# Altium PCB Socket_Power.PcbDoc
Units mm, origin at the board's own origin, x right, y up, seen from the top; angles counter-clockwise.
Board outline 90 x 42.76 mm, 2 copper layers (Top Layer, Bottom Layer), stack 1.58 mm thick; 41 components, 23 nets, 117 pads, 126 vias.
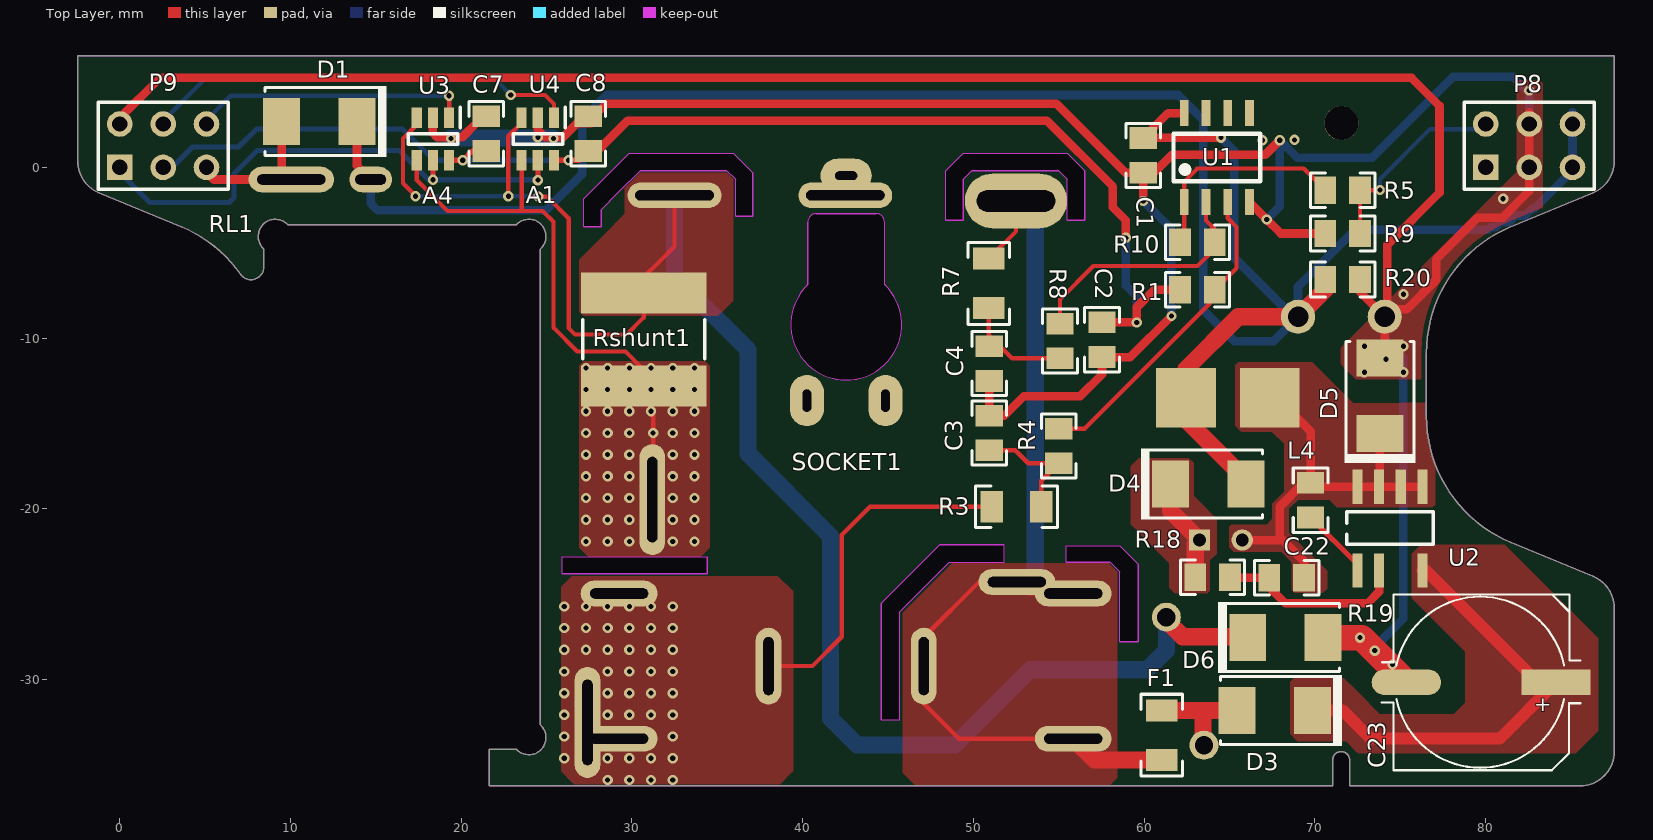
[diagram p0: Top Layer view]
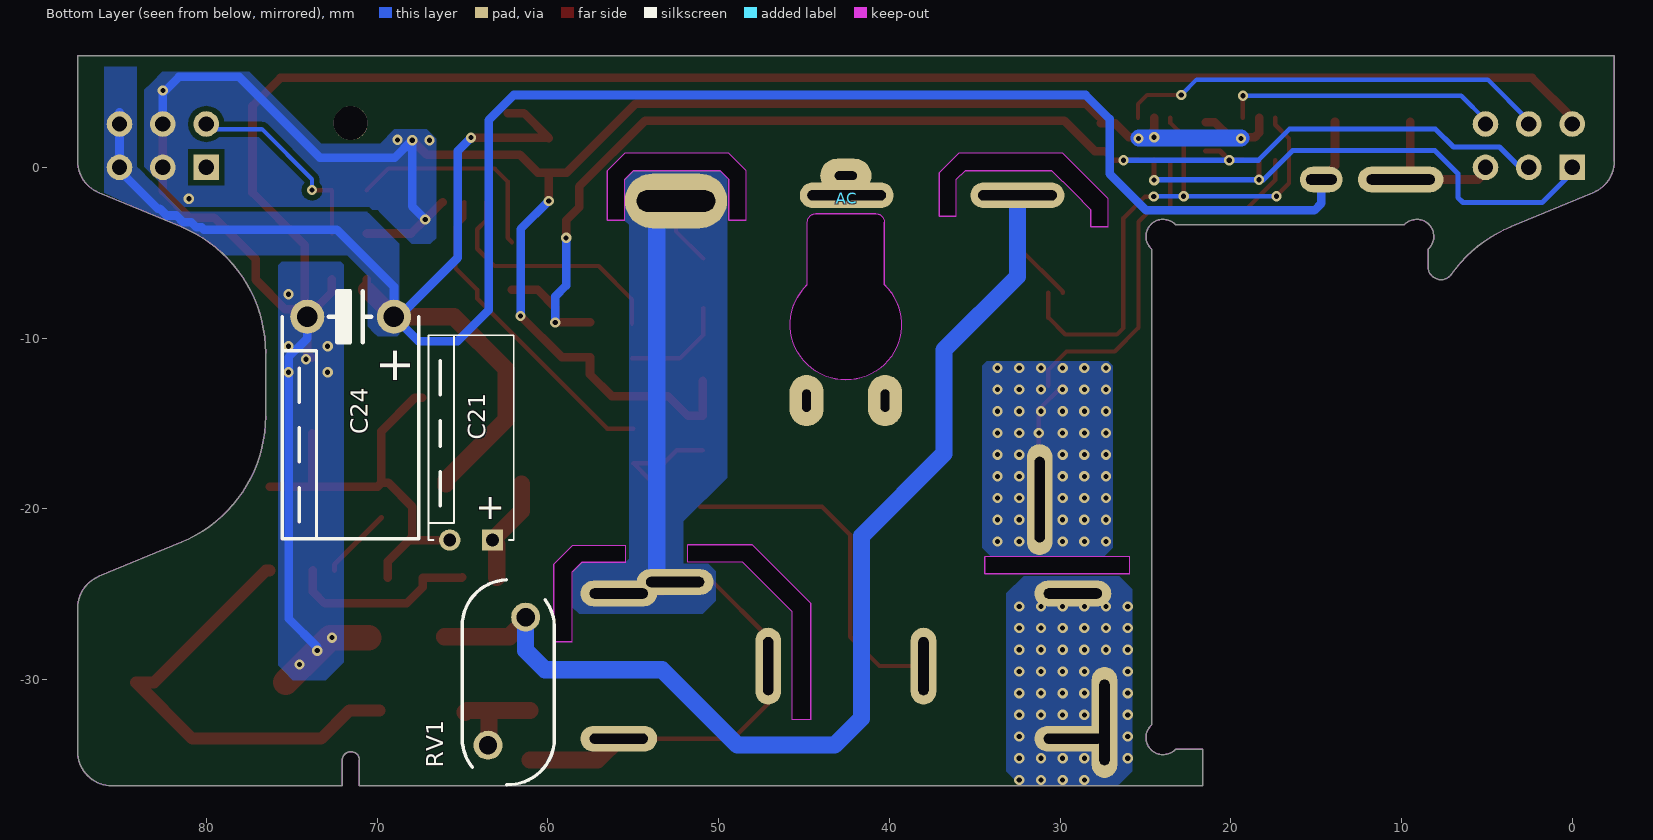
[diagram p1: Bottom Layer view, seen from below]

## Layer stack, top to bottom
Top Solder: solder mask 0.0102, Solder Resist, Dk 3.5
Top Layer: signal copper 0.0356
Dielectric 1: dielectric 1.5086, FR-4, Dk 4.8
Bottom Layer: signal copper 0.0356
Bottom Solder: solder mask 0.0102, Solder Resist, Dk 3.5

## Board outline
21.636,-34.071 23.224,-34.071 ccw(c23.964,-33.4) 24.636,-32.659 24.636,-4.784 ccw(c23.964,-4.043) 23.224,-3.371 9.849,-3.371 ccw(c9.108,-4.043) 8.436,-4.784 8.436,-5.829 cw(c7.686,-5.829) 7.073,-6.262 ccw(c0.536,-10.873) 3.598,-3.482 -1.229,-1.483 cw(c-0.464,0.365) -2.464,0.365 -2.464,6.54 87.536,6.54 87.536,0.365 cw(c85.536,0.365) 86.302,-1.483 81.475,-3.482 ccw(c84.536,-10.873) 76.536,-10.873 76.536,-14.57 ccw(c84.536,-14.57) 81.475,-21.961 86.302,-23.96 cw(c85.536,-25.808) 87.536,-25.808 87.536,-34.221 cw(c85.536,-34.221) 85.536,-36.221 72.036,-36.221 72.036,-34.721 ccw(c71.536,-34.721) 71.036,-34.721 71.036,-36.221 21.636,-36.221
cut-out: 55.448,-23.125 55.448,-22.16 58.572,-22.16 59.665,-23.252 59.665,-27.799 58.572,-27.799 58.572,-23.684 58.014,-23.125
cut-out: 44.602,-32.345 45.695,-32.345 45.695,-26.021 48.59,-23.125 51.816,-23.125 51.816,-22.109 48.031,-22.109 44.602,-25.538
cut-out: 48.387,-3.11 48.387,-0.189 49.403,0.827 55.499,0.827 56.515,-0.189 56.515,-3.11 55.499,-3.11 55.499,-0.697 54.991,-0.189 49.911,-0.189 49.403,-0.697 49.403,-3.11
cut-out: 25.908,-23.811 25.908,-22.795 34.417,-22.795 34.417,-23.811
cut-out: 27.178,-3.491 27.178,-1.84 29.845,0.827 35.941,0.827 37.084,-0.316 37.084,-2.856 36.068,-2.856 36.068,-0.697 35.56,-0.189 30.48,-0.189 29.21,-1.459 28.194,-2.475 28.194,-3.491
cut-out: 40.295,-6.858 ccw(c42.545,-9.204) 44.795,-6.858 44.795,-3.204 ccw(c44.295,-3.204) 44.295,-2.704 40.795,-2.704 ccw(c40.795,-3.204) 40.295,-3.204

## Design rules (kind name [scope] priority, off if disabled: settings)
Clearance Clearance_1 [InNet('GND')] p1: gap=0.3
Clearance cutout [IsRegion] p2: gap=0.01
Clearance keepout [OnLayer('Keep-Out Layer')] p3: gap=0.01
Clearance [All] p4: gap=0.254
HoleSize [All] p1: absolutevalues=TRUE maxlimit=5 minlimit=0.01 maxpercent=80.000 minpercent=20.000
MinimumSolderMaskSliver [All] p1: minsoldermaskwidth=0.01
PolygonConnect [All] p1: connectstyle=Direct reliefconductorwidth=0.254 reliefentries=4 polygonreliefangle="90 Angle" airgapwidth=0.254
RoutingVias [All] p1: holewidth=0.3 width=0.6 viastyle="Through Hole" minholewidth=0.3 minwidth=0.6 maxholewidth=5 maxwidth=5
SilkToSilkClearance [All] p1: silktosilkclearance=0.1
SilkToSolderMaskClearance [IsPad] p1: minsilkscreentomaskgap=0.01 clearancetoexposedcopper=TRUE
SolderMaskExpansion [All] p1: expansion=0.102
Width [All] p1: maxlimit=5 minlimit=0.254 preferedwidth=0.254
26 further rules are at their usual default settings.

## Components (designator, comment, footprint, x,y, rotation, side; value= is the part's Value field where it differs from the comment)
AC "Header 3" CHAN3DONGTO 42.494,-1.637 r0 bottom locked
C1 "104" 0805_HV 59.944,0.7 r90 top
C2 "104" 0805_HV 57.531,-10.095 r90 top
C3 "221" 0805_HV 50.927,-15.556 r270 top
C4 "221" 0805_HV 50.927,-11.492 r90 top
C7 "104" 0805_HV 21.463,1.97 r270 top
C8 "104" 0805_HV 27.432,1.97 r270 top
C21 "10uF" CAP_100N 64.496,-21.83 r0 bottom
C22 "104" 0805_HV 69.748,-19.493 r270 top
C23 "400AX6R8M8x11" PANACAP-G-GENERIC 79.68,-30.161 r180 top locked
C24 "220uF" CAPU200N 71.552,-8.749 r180 bottom locked
D1 "US1M-13-F" SMB 11.684,2.681 r0 top
D3 "US1M-13-F" SMB 67.64,-31.812 r0 top
D4 "US1M-13-F" SMB 63.754,-18.553 r180 top
D5 "US1M-13-F" SMB 73.812,-13.372 r270 top
D6 "US1M-13-F" SMB 68.275,-27.545 r180 top
F1 "Res" 1206 61.036,-33.26 r90 top
L4 "680uF" "Inductor 4.5x5" 65.151,-13.397 r0 top
P8 "Header 3X2" HDR2X3 80.01,0 r0 top
P9 "Header 3X2" HDR2X3 0,0 r0 top locked
R1 "22K" 0805_HV 63.119,-7.174 r180 top
R3 "2M" 1206 52.525,-19.874 r0 top
R4 "2.2K" 0805_HV 54.991,-16.318 r270 top
R5 "10K" 0805_HV 71.628,-1.332 r180 top
R7 "2M" 1206 50.902,-6.791 r270 top
R8 "2.2K" 0805_HV 55.067,-10.171 r270 top
R9 "10K" 0805_HV 71.628,-3.872 r180 top
R10 "22K" 0805_HV 63.119,-4.38 r0 top
R18 "13k" 0805_HV 64.008,-24.014 r180 top
R19 "2K" 0805_HV 68.351,-24.04 r180 top
R20 "3k3" 0805_HV 71.628,-6.564 r180 top
RL1 "Component_1" RELAY20ASLA12VDC 10.045,-0.711 r0 top locked
Rshunt1 "0.006R" RESC2728 30.683,-10.07 r90 top
RV1 "S10K275E2" VAR_S10K275E2 62.316,-30.154 r270 bottom locked
SOCKET1 "Header 3" SOCKET 42.545,-0.49 r0 top locked
U1 "LM358 SOP8_MH" "SOP 8" 64.262,0.573 r0 top locked
U2 "LNK306" "SOP 7" 72.492,-23.606 r90 top locked
U3 "INA181A4IDBVT" SOT95P280X145-6N 18.339,1.665 r270 top
U4 "INA181A1IDBVT" SOT95P280X145-6N 24.486,1.665 r270 top
Wp1 "Socket" PIN1 42.468,-97.043 r0 top
Wp2 "Socket" PIN1 90.915,-86.341 r0 top

## Footprints (in the part's own frame and the unit in brackets; to place one, negate y for a bottom-side part, rotate by r counter-clockwise, add the part's x,y. Pads: shape width x height; smd on the part's side, far side on the other; paste and mask are expansions set on the pad)
0805_HV [mil] "0805 with 30mil clearance between pads"
  rect 50x63 smd: 1(-40,0) 2(40,0)
  silkscreen extent -74,-40 74,40, body extent -43,-29 43,29, height 57
1206 [mm] "1206 from SM-752 data"
  rect 1.3x1.85 smd: 1(1.45,0) 2(-1.45,0)
  silkscreen extent -2.4,-1.21 2.4,1.21, body extent -1.7,-0.9 1.7,0.9, height 1.35
CAP_100N [mm] "PANASONIC"
  rect 1.25x1.25 hole 0.75: 1(-1.25,0)
  round 1.25 hole 0.75: 2(1.25,0)
  silkscreen extent -2.5,-12 2.5,0
CAPU200N [mm]
  round 2 hole 1.2: 1(2.54,0) 2(-2.54,0)
  silkscreen extent -4,-13 4,1.5
CHAN3DONGTO [mm]
  oval 5.5x1.5 hole 0.6 slot 4.6 at 0 deg: 1(-10,0) 2(0,0)
  oval 6x3.2 hole 1.25 slot 4.6 at 0 deg: 3(10,0.33)
  body extent -13,-5.15 13,0.25, height 10.4
HDR2X3 [mm] "Connector; Header; 3x2 Position"
  rect 1.5x1.5 hole 0.9: 1(0,0)
  round 1.5 hole 0.9: 2(0,2.54) 3(2.54,0) 4(2.54,2.54) 5(5.08,0) 6(5.08,2.54)
  silkscreen extent -1.27,-1.27 6.35,3.81
"Inductor 4.5x5" [mm]
  rect 3.5x3.5 smd: 1(2.2,-0.1) 2(-2.7,-0.1)
  body extent -2.6,-2.6 2.2,2.2, height 2
PANACAP-G-GENERIC [mil]
  rect 160x59.06 smd: 1(-175,0)
  oval 160x59.06 smd: 2(170,0)
  silkscreen extent -231,-203 227,203, body extent -233,-203 223,203, height 402
PIN1 [mm] "Connector; Plug"
RELAY20ASLA12VDC [mm]
  oval 5x1.5 hole 0.6 slot 4 at 0 deg paste+0: 1(0,0)
  oval 2.5x1.5 hole 0.6 slot 1.8 at 0 deg paste+0: 2(4.65,0)
  oval 1.5x6.5 hole 0.6 slot 5 at 90 deg paste+0: 3(21.15,-18.75) 4(17.35,-31.8)
  body extent -1.59,-33.68 21.31,0.37, height 19.8
RESC2728 [mm] "Chip Resistor, 2-Leads, Body 6.9x7.1mm, IPC Medium Density"
  rect 2.4x7.35 smd: 1(-2.725,0) 2(2.725,0)
  silkscreen extent -1.15,-3.58 1.15,3.57, body extent -3.55,-3.65 3.55,3.65, height 0.6
SMB [mm] "Molded Diode, 2-Leads, Body 5.4x3.6mm, IPC Medium Density, based on OnSemi component dimensions"
  rect 2.159x2.743 smd: 1(2.21,0) 2(-2.21,0)
  silkscreen extent -3.17,-2.08 3.94,2.08, body extent -2.7,-1.8 2.7,1.8, height 2.32
SOCKET [mm]
  oval 4.5x1.5 hole 0.6 slot 3.4 at 0 deg: 1(-13.3,-24.471) 1(-13.3,-32.971) 2(10,-23.795) 2(13.3,-32.971) 2(13.3,-24.471)
  oval 1.5x4.5 hole 0.6 slot 3.4 at 90 deg: 1(-4.55,-28.72) 2(4.55,-28.72)
  oval 2x3 hole 0.5 slot 1.3 at 90 deg: 3(-2.3,-13.17) 3(2.3,-13.17)
  oval 3x2 hole 0.5 slot 1.3 at 0 deg: 3(0,0.001)
  Keep-Out Layer lines w0.013: -2.25,-6.375 ccw(c0,-8.72) 2.25,-6.375 2.25,-2.72 ccw(c1.75,-2.72) 1.75,-2.22 -1.75,-2.22 ccw(c-1.75,-2.72) -2.25,-2.72 -2.25,-6.375
  body extent -14.74,-33.27 14.86,0.15, height 14.21
"SOP 7" [mm]
  rect 2x0.6 smd: 1(0,0) 2(0,-1.27) 4(0,-3.81) 5(4.9,-3.81) 6(4.9,-2.54) 7(4.9,-1.27) 8(4.9,0)
  silkscreen extent 1.52,-4.44 3.43,0.64, body extent -0.66,-4.38 5.39,0.52, height 1.36
"SOP 8" [mil]
  rect 20x60 smd: 1(-75,-102.5) 2(-25,-102.5) 3(25,-102.5) 4(75,-102.5) 5(75,102.5) 6(25,102.5) 7(-25,102.5) 8(-75,102.5)
  silkscreen extent -100,-55 100,55, body extent -98,-120 100,117, height 63
SOT95P280X145-6N [mm]
  rect 1.2x0.6 smd: 1(-1.25,0.95) 2(-1.25,0) 3(-1.25,-0.95) 4(1.25,-0.95) 5(1.25,0) 6(1.25,0.95)
  silkscreen extent -1.85,-1.45 0.3,1.6, body extent -1.4,-1.45 1.4,1.45, height 1.45
VAR_S10K275E2 [mm] "EPCOS"
  round 1.7 hole 1.067: 1(-3.81,1.016) 2(3.69,-1.184)
  silkscreen extent -6,-2.7 6,2.7, body extent -6.02,-2.7 5.98,2.7, height 15

## Part data
AC SOCKET1: "Header, 3-Pin"
C1 C2 C3 C4 C7 C8 C22: library part CM, "Cap SMD"
C21: library part TU_NHOM_10uF_25V_MH, "TU_NHOM_10uF_25V_MH"
C23: "CAP, AL, 6.8uF, 400V, +/-20%, TH"
C24: library part TU_NHOM_220uF_25V_MH, "TU_NHOM_220uF_25V_MH"
D1 D3 D4 D5 D6: library part MURS160-13-F, "Diode, Ultrafast, 600V, 1A, SMB"
F1: library part Res-SMD, "Resistor"
L4: library part "Inductor 4.5x5_MH"
P8 P9: "Header, 3-Pin, Dual row"
R1 R3 R4 R5 R7 R8 R9 R10 R18 R19 R20 Rshunt1: library part R, "Resistor 1/4W"
RV1: "Varistor 275V RMS 10MM Radial, TH"
U2: library part Component_1
U3 U4: library part INA181

## Free pads (board coordinates)
  round 2 hole 2 paste+0: 2(71.552,2.591)

## Via types
v1: diameter 0.6, hole 0.3, Top Layer to Bottom Layer, tented both sides, 126 vias

## Nets (pads, with @x,y where several pads share a name; then routed paths per layer and width w, separated by ;. In a path a pad name is that pad's centre, name@x,y a point inside that pad or via, vN(x,y) a via of type N, cw(c..) or ccw(c..) an arc to the next point about the centre after c; other vN are vias at no path point)
3.3V: C2.2 C7.2 C8.2 P9.3 R1.2 U3.6 U4.6 | length 77.7
  Top Layer w0.3: U3.6 20.091,0.415 20.63,0.954 C7.2 ; U4.6 v1(26.289,0.415) 26.933,0.415 27.432,0.915 C8.2
  Top Layer w0.5: C8.2 27.965,0.954 29.751,2.74 54.297,2.74 58.166,-1.129 58.166,-2.348 58.928,-3.11 v1(58.928,-4.126) ; C2.2 v1(59.563,-9.079) 59.563,-8.19 60.579,-7.174 R1.2
  Bottom Layer w0.3: P9.3@2.54,-0.3 2.76,-0.3 4.26,1.2 6.96,1.2 8,2.24 16.57,2.24 18.39,0.421 v1(20.091,0.421) 26.284,0.421 v1(26.289,0.415)
  Bottom Layer w0.5: v1(58.928,-4.126) 58.928,-6.92 59.563,-7.555 v1(59.563,-9.079)
BP: C22.2 U2.1 | length 4.2
  Top Layer w0.3: C22.2 72.492,-23.252 U2.1
CURRENT_SIGNAL1: P9.6 U3.1 | length 16.6
  Top Layer w0.254: U3.1 v1(19.289,4.195)
  Bottom Layer w0.254: P9.6@5.08,2.24 P9.6 5.08,2.77 6.505,4.195 v1(19.289,4.195)
CURRENT_SIGNAL2: P9.4 U4.1 | length 25.8
  Top Layer w0.254: v1(22.9,4.24) 24.9,4.24 25.436,3.704 U4.1
  Bottom Layer w0.254: P9.4@2.54,2.24 P9.4 2.54,2.73 4.95,5.14 22,5.14 v1(22.9,4.24)
FB: R18.1 R19.2 U2.2 | length 11.2
  Top Layer w0.5: R18.1 65.049,-24.04 R19.2 67.335,-24.598 68.275,-25.538 73.076,-25.538 73.762,-24.852 U2.2
GND: C1.1 C2.1 C3.1 C4.1 C7.1 C8.1 C23.2 C24.2 D5.2 D6.2 P8.3 P8.4 P9.2 R9.2 R20.1 U1.4 U3.2 U4.2 | length 254.2
  Top Layer w0.5: P9.2@0,2.24 P9.2 0,2.89 2.35,5.24 75.66,5.24 77.3,3.6 77.3,-1.477 74.244,-4.532 74.244,-8.723 74.219,-8.749 C24.2 ; U3.2 18.339,2.021 18.594,1.765 20.061,1.765 20.926,2.63 C7.1@21.463,2.63 ; U4.2 24.486,2.187 24.908,1.765 25.963,1.765 26.778,2.58 C8.1@27.61,2.58 ; C8.1 27.746,2.986 28.5,3.74 54.847,3.74 58.903,-0.316 C1.1 ; C4.1 C3.1 51.816,-14.54 52.959,-13.397 56.261,-13.397 57.531,-12.127 C2.1 59.182,-11.111 v1(61.595,-8.698) ; v1(59.944,-1.967) C1.1 ; U1.4 v1(67.183,-3.046) 68.008,-3.872 R9.2 ; v1(67.945,1.589) 67.096,0.74 61.635,0.74 60.579,-0.316 C1.1 ; R20.1 72.644,-7.301 C24.2 ; D5.2 74.092,-10.882 C24.2 ; C24.2@74.651,-8.317 75.379,-8.317 77.11,-6.586 77.11,-5.375 79.534,-2.951 80.982,-2.951 82.55,-1.383 P8.3 P8.4 P8.4@82.55,3.24
  Top Layer w1.5: D6.2 v1(72.644,-27.545) 72.746,-27.545 v1(73.508,-28.307) C23.2
  Bottom Layer w0.254: v1@19.38,1.691 v1(19.406,1.691) ; v1@25.375,1.716 v1(25.4,1.691)
  Bottom Layer w0.5: v1(59.944,-1.967) 61.595,-3.618 v1(61.595,-8.698) ; v1(67.183,-3.046) 67.945,-2.284 v1(67.945,1.589) 68.961,0.573 73.355,0.573 78.08,5.297 81.61,5.297 v1@82.55,4.358 ; v1(73.508,-28.307) 73.508,-28.104 75.184,-26.427 v1(75.184,-12) 75.184,-11.111 74.092,-10.019 C24.2 ; P8.4@82.55,2.24 P8.4 v1@82.55,4.358 ; v1(82.55,4.51) v1@82.55,4.358
  Bottom Layer w1: v1@19.406,1.716 v1@25.375,1.716
  other v1: 74.549,-29.12 72.898,-12 74.168,-11.238 72.898,-10.476 75.184,-10.476 75.184,-7.428 81.026,-1.84 66.929,1.589 68.809,1.614 24.486,1.767
L: AC.1 D6.1 Rshunt1.2 RV1.1 U3.3 U4.3 | length 103.6
  Top Layer w0.254: v1(17.323,-1.688) 17.323,-1.662 16.586,-0.926 16.586,1.691 17.389,2.493 U3.3 ; v1(22.758,-1.688) 22.758,1.818 23.536,2.595 U4.3 ; v1(24.511,-1.713) 25.019,-1.713 26.289,-2.983 26.289,-9.409 26.67,-9.79 29.693,-9.79 30.683,-8.8 Rshunt1.2 ; Rshunt1.2@29.845,-7.337 29.845,-7.276 32.494,-4.626 AC.1
  Top Layer w1: RV1.1 61.3,-26.539 62.255,-27.494 D6.1@66.065,-27.494
  Bottom Layer w0.254: v1(17.323,-1.688) v1(22.758,-1.688) v1@24.511,-1.688
  Bottom Layer w1: AC.1 32.494,-6.394 36.805,-10.705 36.805,-16.775 41.631,-21.601 41.631,-32.269 43.205,-33.844 48.895,-33.844 53.315,-29.424 60.173,-29.424 61.3,-28.297 RV1.1
L1: R3.2 RL1.4 SOCKET1.1 | length 20.4
  Top Layer w0.254: SOCKET1.1@37.995,-29.21 40.575,-29.21 42.291,-27.494 42.291,-21.525 43.942,-19.874 R3.2
  other v1: 28.575,-35.876 29.845,-35.876 31.115,-35.876 32.385,-35.876 26.035,-34.606 28.575,-34.606 29.845,-34.606 31.115,-34.606 32.385,-34.606 26.035,-33.336 32.385,-33.336 26.035,-32.066 28.575,-32.066 29.845,-32.066 31.115,-32.066 32.385,-32.066 26.035,-30.796 28.575,-30.796 29.845,-30.796 31.115,-30.796 32.385,-30.796 26.035,-29.526 28.575,-29.526 29.845,-29.526 31.115,-29.526 32.385,-29.526 26.035,-28.256 27.305,-28.256 28.575,-28.256 29.845,-28.256 31.115,-28.256 32.385,-28.256 26.035,-26.986 27.305,-26.986 28.575,-26.986 29.845,-26.986 31.115,-26.986 32.385,-26.986 26.035,-25.716 27.305,-25.716 28.575,-25.716 29.845,-25.716 31.115,-25.716 32.385,-25.716
LOUT: RL1.3 Rshunt1.1 U3.4 U4.4 | length 33.9
  Top Layer w0.254: U3.4 17.389,-0.738 19.202,-2.551 23.52,-2.551 ; U4.4 23.536,-2.536 23.52,-2.551 ; Rshunt1.1@29.845,-12.787 31.242,-14.184 v1(31.242,-15.556) 31.242,-19.414 RL1.3 ; Rshunt1.1 30.683,-11.848 29.616,-10.781 26.797,-10.781 25.4,-9.384 25.4,-3.186 24.765,-2.551 23.52,-2.551
  other v1: 27.305,-21.906 28.575,-21.906 29.845,-21.906 32.385,-21.906 33.655,-21.906 27.305,-20.636 28.575,-20.636 29.845,-20.636 32.385,-20.636 33.655,-20.636 27.305,-19.366 28.575,-19.366 29.845,-19.366 32.385,-19.366 33.655,-19.366 27.305,-18.096 28.575,-18.096 29.845,-18.096 32.385,-18.096 33.655,-18.096 27.305,-16.826 28.575,-16.826 29.845,-16.826 32.385,-16.826 33.655,-16.826 27.305,-15.556 28.575,-15.556 29.845,-15.556 32.385,-15.556 33.655,-15.556 27.305,-14.286 28.575,-14.286 29.845,-14.286 31.115,-14.286 32.385,-14.286 33.655,-14.286 27.305,-13.016 28.575,-13.016 29.845,-13.016 31.115,-13.016 32.385,-13.016 33.655,-13.016 27.305,-11.746 28.575,-11.746 29.845,-11.746 31.115,-11.746 32.385,-11.746 33.655,-11.746
N: AC.3 F1.2 R7.2 SOCKET1.2 | length 57.4
  Top Layer w0.254: R7.2 52.494,-3.748 AC.3 ; SOCKET1.2@55.845,-33.461 49.147,-33.461 47.095,-31.409 47.095,-29.21 47.095,-27.516 50.326,-24.285 52.545,-24.285 53.221,-24.961 SOCKET1.2@55.845,-24.961
  Top Layer w1: SOCKET1.2@55.845,-33.461 57.094,-34.71 F1.2
  Bottom Layer w1: AC.3 52.73,-1.967 53.619,-2.856 53.619,-23.989 53.323,-24.285 SOCKET1.2@52.545,-24.285
NetC3_2: C3.2 R3.1 R4.2 | length 7.3
  Top Layer w0.254: C3.2 52.451,-16.572 53.213,-17.334 R4.2 53.975,-18.35 R3.1
NetC4_2: C4.2 R7.1 R8.2 | length 6.3
  Top Layer w0.254: R7.1 50.902,-9.816 52.273,-11.187 R8.2
NetC21_1: C21.1 D4.1 R18.2 | length 6.3
  Top Layer w1: D4.1 61.544,-20.128 C21.1 62.992,-22.084 R18.2
NetR1_1: R1.1 R4.1 U1.3 | length 18.7
  Top Layer w0.254: R4.1 56.515,-15.302 64.135,-7.682 R1.1 65.405,-5.904 65.405,-3.491 64.897,-2.983 U1.3
NetR8_1: R8.1 R10.2 U1.2 | length 14.8
  Top Layer w0.254: R8.1 55.067,-7.733 57.023,-5.777 63.119,-5.777 64.135,-4.761 R10.2@64.135,-4.507 ; U1.2 63.627,-3.11 64.135,-3.618 R10.2@64.135,-4.507 ; R10.2 R10.2@64.135,-4.507
NN: D3.2 F1.1 RV1.2 | length 6
  Top Layer w1: F1.1 63.271,-31.81 ; RV1.2@63.439,-33.844 63.439,-31.978 63.271,-31.81 ; D3.2@64.846,-31.914 64.742,-31.81 63.271,-31.81
RL1C: D1.2 P9.5 RL1.1 | length 8.8
  Top Layer w0.5: P9.5@5.08,-0.3 5.491,-0.711 RL1.1 9.474,-0.14 D1.2
S: C21.2 C22.1 D5.1 L4.1 R19.1 U2.5 U2.6 U2.7 U2.8 | length 25.5
  Top Layer w0.5: C21.2 68.123,-21.83 ; L4.1 67.791,-13.497 69.748,-15.454 C22.1 ; R19.1 69.367,-23.074 68.123,-21.83 ; D5.1 73.812,-18.655 U2.7 ; U2.5 U2.6 U2.7 ; 68.123,-21.83 67.945,-21.652 67.945,-19.874 69.342,-18.477 C22.1 ; C22.1 69.977,-18.706 U2.8 U2.7
V1: R5.2 R10.1 U1.1 | length 12.8
  Top Layer w0.254: R10.1 62.357,-4.126 U1.1 62.357,-0.824 63.119,-0.062 69.342,-0.062 R5.2
VCC_RELAY: C1.2 C24.1 D1.1 D4.2 L4.2 P8.5 P8.6 R20.2 RL1.2 U1.8 | length 140.7
  Top Layer w0.5: D1.1 13.894,0.09 RL1.2 ; C1.2 61.404,3.177 U1.8 ; C1.2@60,1.74 v1(64.5,1.74) ; D4.2@65.913,-18.604 66.04,-18.731 D4.2@66.218,-18.731 ; R20.2@70.612,-7.149 R20.2
  Top Layer w1: D4.2 65.964,-18.299 62.451,-14.786 L4.2 62.451,-11.804 65.507,-8.749 C24.1 R20.2@70.612,-7.149
  Bottom Layer w0.5: RL1.2 14.695,-2.108 15.104,-2.517 24.952,-2.517 27.1,-0.369 27.1,2.84 28.5,4.24 62,4.24 63.475,2.765 63.475,-8.368 65.278,-10.171 67.589,-10.171 C24.1 ; v1(64.5,1.74) 65.278,0.962 65.278,-5.294 68.732,-8.749 C24.1 ; P8.6@85.09,3.24 P8.6 P8.5 85.09,-0.189 82.862,-2.417 82.727,-2.417 82.327,-2.818 81.76,-2.818 81.358,-3.22 80.873,-3.22 80.577,-3.516 80.278,-3.516 80.151,-3.643 72.365,-3.643 69.012,-6.996 C24.1
VIN1: C23.1 D3.1 U2.4 | length 26.9
  Top Layer w0.7: D3.1 71.628,-31.812 73.279,-33.463 80.823,-33.463 C23.1 83.058,-30.161 76.503,-23.606 U2.4
VOL_SIGNAL: P8.2 R5.1 R9.1 | length 11.8
  Top Layer w0.254: R9.1 R5.1 v1(73.812,-1.332)
  Bottom Layer w0.254: v1(73.812,-1.332) 73.812,-0.697 76.749,2.24 P8.2@80.01,2.24
VREF: P9.1 U3.5 U4.5 | length 30.3
  Top Layer w0.3: v1(18.339,-0.722) U3.5 ; v1(24.486,-0.748) U4.5
  Bottom Layer w0.3: P9.1@0,-0.3 1.76,-2.06 6.4,-2.06 6.7,-1.76 6.7,-0.36 8.039,0.979 16.383,0.979 18.085,-0.722 v1(18.339,-0.722) 24.46,-0.722 v1(24.486,-0.748)
pads on no net: AC.2 P8.1 SOCKET1.3 U1.5 U1.6 U1.7

## Polygon pours and split planes (outlines as drawn)
VIN1 on Top Layer "Bottom Layer-No Net" (solid, remove dead copper, pour order 29): 68.555,-30.237 68.555,-33.184 68.885,-33.514 68.986,-33.615 70.256,-33.615 71.831,-33.615 72.466,-34.25 72.542,-34.327 82.017,-34.327 85.268,-34.327 86.563,-33.031 86.589,-33.006 86.589,-30.11 86.589,-27.57 82.55,-23.532 81.128,-22.109 76.632,-22.109 76.2,-22.109 75.971,-22.338 75.667,-22.643 75.667,-23.836 75.667,-25.233 76.53,-26.097 78.816,-28.383 78.816,-30.821 78.816,-31.355 78.232,-31.939 78.13,-32.041 76.124,-32.041 73.812,-32.041 72.441,-30.669 71.704,-29.932 68.758,-29.932 68.555,-30.136 68.555,-30.186
N on Top Layer "Bottom Layer-No Net" (solid, remove dead copper, pour order 24): 57.912,-23.176 48.768,-23.176 47.117,-24.827 45.847,-26.097 45.847,-30.415 45.847,-35.449 46.609,-36.211 53.848,-36.211 57.958,-36.211 58.293,-35.876 58.42,-35.749 58.42,-33.463 58.42,-23.684 57.912,-23.176
L1 on Top Layer "Bottom Layer-No Net" (solid, remove dead copper, pour order 23): 34.353,-23.938 26.479,-23.938 26.098,-24.319 25.844,-24.573 25.844,-26.097 25.844,-35.368 26.479,-36.003 26.606,-36.13 28.765,-36.13 38.671,-36.13 39.306,-35.495 39.433,-35.368 39.433,-30.796 39.433,-24.827 38.544,-23.938
LOUT on Top Layer "Bottom Layer-No Net" (solid, remove dead copper, pour order 21): 27.305,-11.365 27.178,-11.365 26.924,-11.619 26.924,-21.144 26.924,-22.287 27.178,-22.541 27.432,-22.795 29.845,-22.795 34.036,-22.795 34.417,-22.414 34.544,-22.287 34.544,-20.382 34.544,-11.619 34.29,-11.365
L on Top Layer "Bottom Layer-No Net" (solid, remove dead copper, pour order 19): 35.56,-0.316 30.48,-0.316 30.226,-0.57 29.591,-1.205 29.591,-2.094 29.591,-2.729 28.321,-3.999 26.924,-5.396 26.924,-7.682 26.924,-8.444 27.178,-8.698 27.813,-8.698 35.052,-8.698 35.56,-8.19 35.941,-7.809 35.941,-0.697
NetC21_1 on Top Layer "Bottom Layer-No Net" (solid, remove dead copper, pour order 30): 62.611,-17.029 59.69,-17.029 59.385,-17.334 59.207,-17.512 59.207,-17.817 59.207,-20.915 59.842,-21.55 61.468,-23.176 61.468,-24.192 61.468,-24.624 61.773,-24.929 61.798,-24.954 62.916,-24.954 63.703,-24.954 63.856,-24.802 63.856,-23.582 63.856,-23.024 64.135,-22.744 64.262,-22.617 64.262,-21.042 64.262,-20.611 63.221,-19.569 62.89,-19.239 62.89,-18.274 62.89,-17.309 62.611,-17.029
GND on Top Layer "Bottom Layer-No Net" (solid, remove dead copper, pour order 36): 74.041,-8.038 81.813,-0.265 81.813,4.027 81.813,4.967 81.915,5.069 81.94,5.094 83.134,5.094 83.185,5.094 83.312,4.967 83.337,4.942 83.337,3.9 83.337,-2.636 83.21,-2.763 83.194,-2.78 82.118,-3.212 82.093,-3.237 80.061,-4.228 80.01,-4.278 78.156,-5.955 76.937,-8.139 76.53,-9.511 76.53,-12.406 72.39,-12.406 71.73,-11.746 71.526,-11.543 71.526,-10.552 71.577,-10.501 74.549,-7.53
S on Top Layer "Bottom Layer-No Net" (solid, remove dead copper, pour order 28): 64.999,-21.042 64.999,-22.262 65.227,-22.49 65.253,-22.516 66.345,-22.516 68.021,-22.516 68.377,-22.871 68.631,-23.125 68.631,-24.649 68.631,-24.725 68.783,-24.878 68.834,-24.929 69.901,-24.929 70.46,-24.929 70.663,-24.725 70.714,-24.675 70.714,-23.887 70.714,-23.633 68.656,-21.576 68.478,-21.398 68.478,-20.611 68.478,-20.001 69.012,-19.468 69.825,-19.468 70.841,-19.468 71.222,-19.849 71.272,-19.899 76.454,-19.899 76.886,-19.899 77.038,-19.747 77.038,-18.604 77.038,-17.664 76.863,-16.798 76.657,-16.013 76.53,-15.018 76.53,-13.778 75.057,-13.778 75.032,-13.803 73.254,-13.803 72.238,-13.803 70.307,-11.873 69.85,-11.416 68.25,-11.416 65.507,-11.416 65.303,-11.619 65.329,-11.644 65.329,-12.178 65.329,-15.124 65.684,-15.48 66.98,-15.48 67.488,-15.48 68.224,-16.216 68.199,-16.242 68.199,-17.105 68.199,-19.01 67.589,-19.62 67.513,-19.696 67.513,-20.458 67.513,-20.585 67.208,-20.89 67.158,-20.941 65.786,-20.941 65.1,-20.941
GND on Bottom Layer "Bottom Layer-No Net" (solid, remove dead copper, pour order 32): 66.548,1.614 66.548,-3.872 66.548,-4.151 66.853,-4.456 66.878,-4.482 67.462,-4.482 67.97,-4.482 69.774,-2.678 69.977,-2.475 81.407,-2.475 83.388,-0.494 83.642,-0.24 83.642,1.132 83.642,4.535 83.21,4.967 82.575,5.602 81.153,5.602 77.495,5.602 75.438,3.545 73.279,1.386 70.282,1.386 69.825,1.386 68.986,2.224 67.107,2.224 66.548,1.665
GND on Bottom Layer "Bottom Layer-No Net" (solid, remove dead copper, pour order 27): 71.958,-5.726 71.958,-28.993 72.568,-29.602 73,-30.034 74.295,-30.034 74.93,-30.034 75.413,-29.551 75.794,-29.17 75.794,-24.979 75.794,-5.726 75.59,-5.523 75.514,-5.523 72.136,-5.523 71.958,-5.701
N on Bottom Layer "Bottom Layer-No Net" (solid, remove dead copper, pour order 25): 52.654,-22.439 52.095,-22.998 52.095,-23.151 52.019,-23.227 51.359,-23.227 50.597,-23.227 50.292,-23.532 50.165,-23.659 50.165,-24.725 50.165,-25.386 50.47,-25.691 50.927,-26.148 57.302,-26.148 58.166,-26.148 58.572,-25.741 58.547,-25.716 58.547,-25.081 58.547,-23.659 58.014,-23.125 55.448,-23.125 55.067,-22.744 54.94,-22.744
N on Bottom Layer "Bottom Layer-No Net" (solid, remove dead copper, pour order 22): 49.505,-1.611 49.505,-4.99 49.505,-18.172 52.07,-20.738 52.07,-22.77 52.07,-24.141 52.019,-24.192 51.841,-24.37 51.029,-24.37 54.254,-24.37 54.534,-24.09 54.889,-24.446 55.27,-24.446 55.397,-24.446 55.423,-24.471 55.245,-24.294 55.245,-22.643 55.245,-3.364 55.499,-3.11 55.474,-3.085 55.474,-0.875 55.474,-0.672 54.991,-0.189 49.911,-0.189 49.53,-0.57 49.505,-0.595 49.505,-1.434
L1 on Bottom Layer "Bottom Layer-No Net" (solid, remove dead copper, pour order 26): 32.131,-23.938 26.543,-23.938 25.781,-24.7 25.781,-28.002 25.781,-35.368 26.543,-36.13 26.624,-36.211 32.131,-36.211 32.304,-36.211 32.893,-35.622 33.147,-35.368 33.147,-31.812 33.147,-24.954 32.131,-23.938
LOUT on Bottom Layer "Bottom Layer-No Net" (solid, remove dead copper, pour order 20): 27.305,-11.365 27.178,-11.365 26.924,-11.619 26.924,-21.144 26.924,-22.287 27.178,-22.541 27.432,-22.795 29.845,-22.795 34.036,-22.795 34.417,-22.414 34.544,-22.287 34.544,-20.382 34.544,-11.619 34.29,-11.365
VCC_RELAY on Bottom Layer "Bottom Layer-No Net" (solid, remove dead copper, pour order 33): 68.707,-9.79 68.707,-4.482 69.596,-3.593 70.587,-2.602 73.533,-2.602 81.432,-2.602 83.21,-0.824 84.074,0.04 84.074,5.907 85.979,5.907 85.979,0.751 85.979,-1.499 85.11,-1.9 83.51,-2.639 82.741,-2.958 81.991,-3.237 81.746,-3.482 81.475,-3.482 79.54,-4.609 79.007,-5.142 73.863,-5.142 71.755,-5.142 70.993,-5.904 70.561,-6.336 70.561,-8.495 70.561,-9.308 70.155,-9.714 69.977,-9.892 68.834,-9.892 68.707,-9.765 68.707,-9.739
N on Bottom Solder "Bottom Layer-No Net" (solid): 52.197,-22.058 52.197,-23.125 51.994,-23.328 51.206,-23.328 50.648,-23.328 50.495,-23.481 50.216,-23.76 50.216,-24.395 50.216,-25.284 50.571,-25.64 51.003,-26.072 52.629,-26.072 58.242,-26.072 58.572,-25.741 58.572,-23.684 58.014,-23.125 55.448,-23.125 55.448,-23.1 54.762,-22.414
L1 on Bottom Solder "Bottom Layer-No Net" (solid): 27.915,-24.09 26.695,-24.09 26.01,-24.776 26.01,-26.097 26.01,-35.165 26.645,-35.8 26.873,-36.028 29.159,-36.028 32.283,-36.028 32.868,-35.444 32.893,-35.419 32.893,-32.244 32.893,-24.827 32.182,-24.116
LOUT on Bottom Solder "Bottom Layer-No Net" (solid): 28.575,-21.906 29.464,-22.795 30.861,-22.795 33.02,-22.795 33.401,-22.414 33.401,-19.874 33.401,-15.81 32.893,-15.302 32.639,-15.048 30.861,-15.048 29.083,-15.048 28.575,-15.556

## Keep-outs
Keep-Out Layer:
  lines w0.013: -2.464,0.365 ccw(c-0.464,0.365) -1.229,-1.483 ; -2.464,0.365 ccw(c-0.464,0.365) -1.229,-1.483 ; -2.464,0.365 -2.464,6.54 ; -2.464,0.365 -2.464,6.54 ; -2.464,6.54 87.536,6.54 ; -2.464,6.54 87.536,6.54 ; -1.229,-1.483 3.598,-3.482 ; -1.229,-1.483 3.598,-3.482 ; -1.229,-1.483 -1.229,-1.483 ; 3.598,-3.482 cw(c0.536,-10.873) 7.073,-6.262 ; 3.598,-3.482 cw(c0.536,-10.873) 7.073,-6.262 ; 3.598,-3.482 3.598,-3.482 ; 7.073,-6.262 ccw(c7.686,-5.829) 8.436,-5.829 ; 7.073,-6.262 ccw(c7.686,-5.829) 8.436,-5.829 ; 7.073,-6.262 7.073,-6.262 ; 8.436,-5.829 8.436,-4.784 ; 8.436,-5.829 8.436,-4.784 ; 8.436,-4.784 cw(c9.108,-4.043) 9.849,-3.371 ; 8.436,-4.784 cw(c9.108,-4.043) 9.849,-3.371 ; 9.849,-3.371 23.224,-3.371 ; 9.849,-3.371 23.224,-3.371 ; 21.636,-36.221 71.036,-36.221 ; 21.636,-36.221 21.636,-34.071 ; 21.636,-36.221 71.036,-36.221 ; 21.636,-36.221 21.636,-34.071 ; 21.636,-34.071 23.224,-34.071 ; 21.636,-34.071 23.224,-34.071 ; 23.224,-34.071 ccw(c23.964,-33.4) 24.636,-32.659 ; 23.224,-34.071 ccw(c23.964,-33.4) 24.636,-32.659 ; 23.224,-3.371 cw(c23.964,-4.043) 24.636,-4.784 ; 23.224,-3.371 cw(c23.964,-4.043) 24.636,-4.784 ; 24.636,-32.659 24.636,-4.784 ; 24.636,-32.659 24.636,-4.784 ; 40.295,-6.858 ccw(c42.545,-9.204) 44.795,-6.858 ; 40.295,-6.858 ccw(c42.545,-9.204) 44.795,-6.858 ; 40.295,-6.858 40.295,-3.204 ; 40.295,-6.858 40.295,-3.204 ; 40.295,-3.204 cw(c40.795,-3.204) 40.795,-2.704 ; 40.295,-3.204 cw(c40.795,-3.204) 40.795,-2.704 ; 40.295,-3.204 40.295,-3.204 ; 40.795,-2.704 44.295,-2.704 ; 40.795,-2.704 44.295,-2.704 ; 40.795,-2.704 40.795,-2.704 ; 44.295,-2.704 cw(c44.295,-3.204) 44.795,-3.204 ; 44.295,-2.704 cw(c44.295,-3.204) 44.795,-3.204 ; 44.295,-2.704 44.295,-2.704 ; 44.795,-6.858 44.795,-3.204 ; 44.795,-6.858 44.795,-3.204 ; 44.795,-3.204 44.795,-3.204 ; 71.036,-36.221 71.036,-34.721 ; 71.036,-36.221 71.036,-34.721 ; 71.036,-34.721 cw(c71.536,-34.721) 72.036,-34.721 ; 71.036,-34.721 cw(c71.536,-34.721) 72.036,-34.721 ; 71.036,-34.721 71.036,-34.721 ; 72.036,-36.221 85.536,-36.221 ; 72.036,-36.221 72.036,-34.721 ; 72.036,-36.221 85.536,-36.221 ; 72.036,-36.221 72.036,-34.721 ; 76.536,-14.57 ccw(c84.536,-14.57) 81.475,-21.961 ; 76.536,-14.57 ccw(c84.536,-14.57) 81.475,-21.961 ; 76.536,-14.57 76.536,-10.873 ; 76.536,-14.57 76.536,-10.873 ; 76.536,-10.873 cw(c84.536,-10.873) 81.475,-3.482 ; 76.536,-10.873 cw(c84.536,-10.873) 81.475,-3.482 ; 81.475,-21.961 86.302,-23.96 ; 81.475,-21.961 81.475,-21.961 ; 81.475,-21.961 86.302,-23.96 ; 81.475,-3.482 86.302,-1.483 ; 81.475,-3.482 86.302,-1.483 ; 81.475,-3.482 81.475,-3.482 ; 85.536,-36.221 ccw(c85.536,-34.221) 87.536,-34.221 ; 85.536,-36.221 ccw(c85.536,-34.221) 87.536,-34.221 ; 86.302,-23.96 cw(c85.536,-25.808) 87.536,-25.808 ; 86.302,-23.96 cw(c85.536,-25.808) 87.536,-25.808 ; 86.302,-23.96 86.302,-23.96 ; 86.302,-1.483 ccw(c85.536,0.365) 87.536,0.365 ; 86.302,-1.483 ccw(c85.536,0.365) 87.536,0.365 ; 86.302,-1.483 86.302,-1.483 ; 87.536,-34.221 87.536,-25.808 ; 87.536,-34.221 87.536,-25.808 ; 87.536,0.365 87.536,6.54 ; 87.536,0.365 87.536,6.54 ; 25.908,-23.811 25.908,-22.795 34.417,-22.795 34.417,-23.811 25.908,-23.811 ; 27.178,-3.491 27.178,-1.84 29.845,0.827 35.941,0.827 37.084,-0.316 37.084,-2.856 36.068,-2.856 36.068,-0.697 35.56,-0.189 30.48,-0.189 29.21,-1.459 28.194,-2.475 28.194,-3.491 27.178,-3.491 ; 44.602,-32.345 45.695,-32.345 45.695,-26.021 48.59,-23.125 51.816,-23.125 51.816,-22.109 48.031,-22.109 44.602,-25.538 44.602,-32.345 ; 48.387,-3.11 48.387,-0.189 49.403,0.827 55.499,0.827 56.515,-0.189 56.515,-3.11 55.499,-3.11 55.499,-0.697 54.991,-0.189 49.911,-0.189 49.403,-0.697 49.403,-3.11 48.387,-3.11 ; 55.448,-23.125 55.448,-22.16 58.572,-22.16 59.665,-23.252 59.665,-27.799 58.572,-27.799 58.572,-23.684 58.014,-23.125 55.448,-23.125

## Silkscreen, mask and mechanical layers (free items; w line width, h text height)
Top Overlay:
  text "A1" at 23.774,-2.094 h1
  text "A4" at 17.704,-2.145 h1
Top Solder:
  lines w6: 29.058,-30.466 28.905,-30.618 28.905,-33.057 35.992,-33.057 36.043,-33.006 ; 30.81,-14.515 31.166,-14.87 31.166,-19.188 ; 31.42,-5.65 32.563,-4.507 32.563,-3.77
Bottom Solder:
  lines w3: 52.502,-2.373 52.553,-2.424 52.553,-16.369 53.696,-17.512 53.696,-22.668
  lines w6: 29.312,-27.24 29.312,-32.93 29.337,-32.955
Mechanical 5:
  circle w0.013: c0.005,0.709 r0.45
  circle w0.013: c5.085,0.709 r0.45
  circle w0.013: c2.545,0.709 r0.45
  circle w0.013: c5.085,3.249 r0.45
  circle w0.013: c2.545,3.249 r0.45
  circle w0.013: c0.005,3.249 r0.45
  circle w0.013: c-0.012,0.688 r0.45
  circle w0.013: c5.068,0.688 r0.45
  circle w0.013: c2.528,0.688 r0.45
  circle w0.013: c5.068,3.228 r0.45
  circle w0.013: c2.528,3.228 r0.45
  circle w0.013: c-0.012,3.228 r0.45
  lines w0.013: 25.578,-36.232 25.578,-24.439 cw(c26.078,-24.439) 25.724,-24.085 26.431,-23.378 cw(c26.785,-23.732) 26.785,-23.232 58.271,-23.232 cw(c58.271,-23.732) 58.624,-23.378 59.331,-24.085 cw(c58.978,-24.439) 59.478,-24.439 59.478,-36.232 ; 40.428,-18.932 44.628,-18.932 44.628,-16.432 40.428,-16.432 40.428,-18.932
  lines w0.05: 26.797,-3.999 26.797,-1.713 ; 26.797,-3.872 29.21,-1.459
Mechanical 13:
  lines w0.01: 42.545,-1.861 42.545,-1.311
  lines w0.013: 30.645,-1.861 cw(c30.645,-1.586) 30.645,-1.311 34.445,-1.311 cw(c34.445,-1.586) 34.445,-1.861 30.645,-1.861 ; 40.645,-1.861 cw(c40.645,-1.586) 40.645,-1.311 44.445,-1.311 cw(c44.445,-1.586) 44.445,-1.861 40.645,-1.861 ; 50.37,-2.281 ccw(c50.65,-2.281) 50.65,-2.561 54.44,-2.561 ccw(c54.44,-2.281) 54.72,-2.281 54.72,-1.586 ccw(c54.445,-1.586) 54.445,-1.311 50.645,-1.311 ccw(c50.645,-1.586) 50.37,-1.586 50.37,-2.281

## Text inside footprints (layer, text, board x,y; h text height)
C21: Bottom Overlay "+" at 62.496,-19.33 h1.52 r180
C23: Top Overlay "+" at 83.88,-31.136 h0.89 r180
C24: Bottom Overlay "+" at 68.052,-12.749 h2 r270